# EAGLE board CT_Metering_Assignment-V_33_error checked for online (EAGLE 8.2.2)
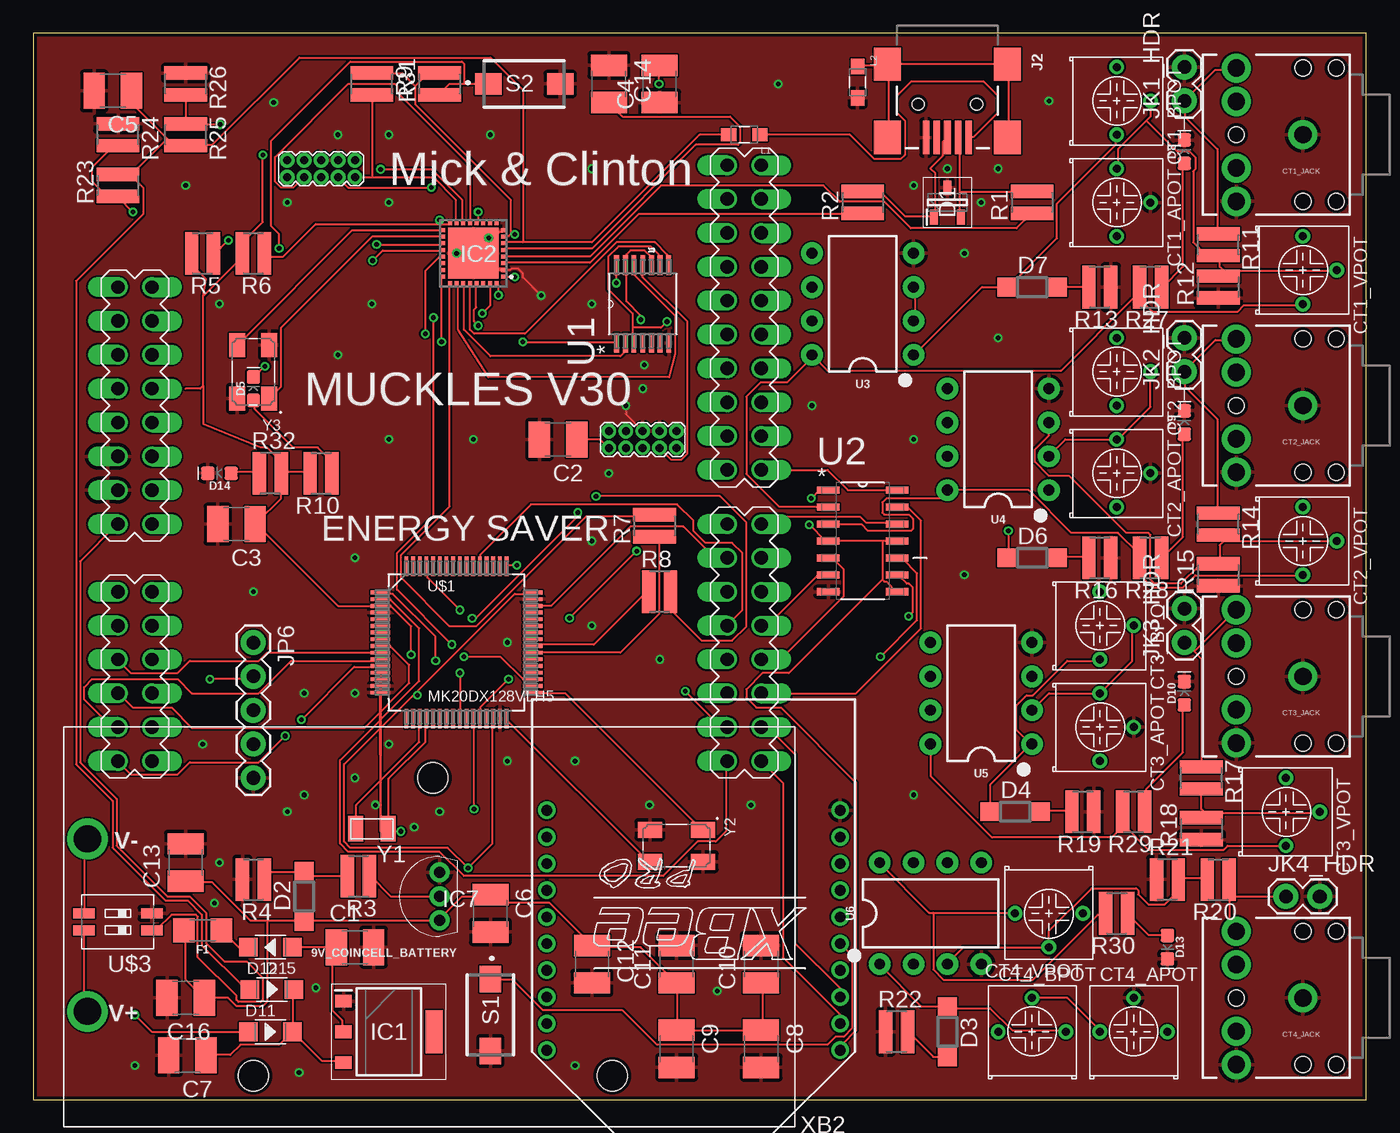
[diagram p0: board, top side]
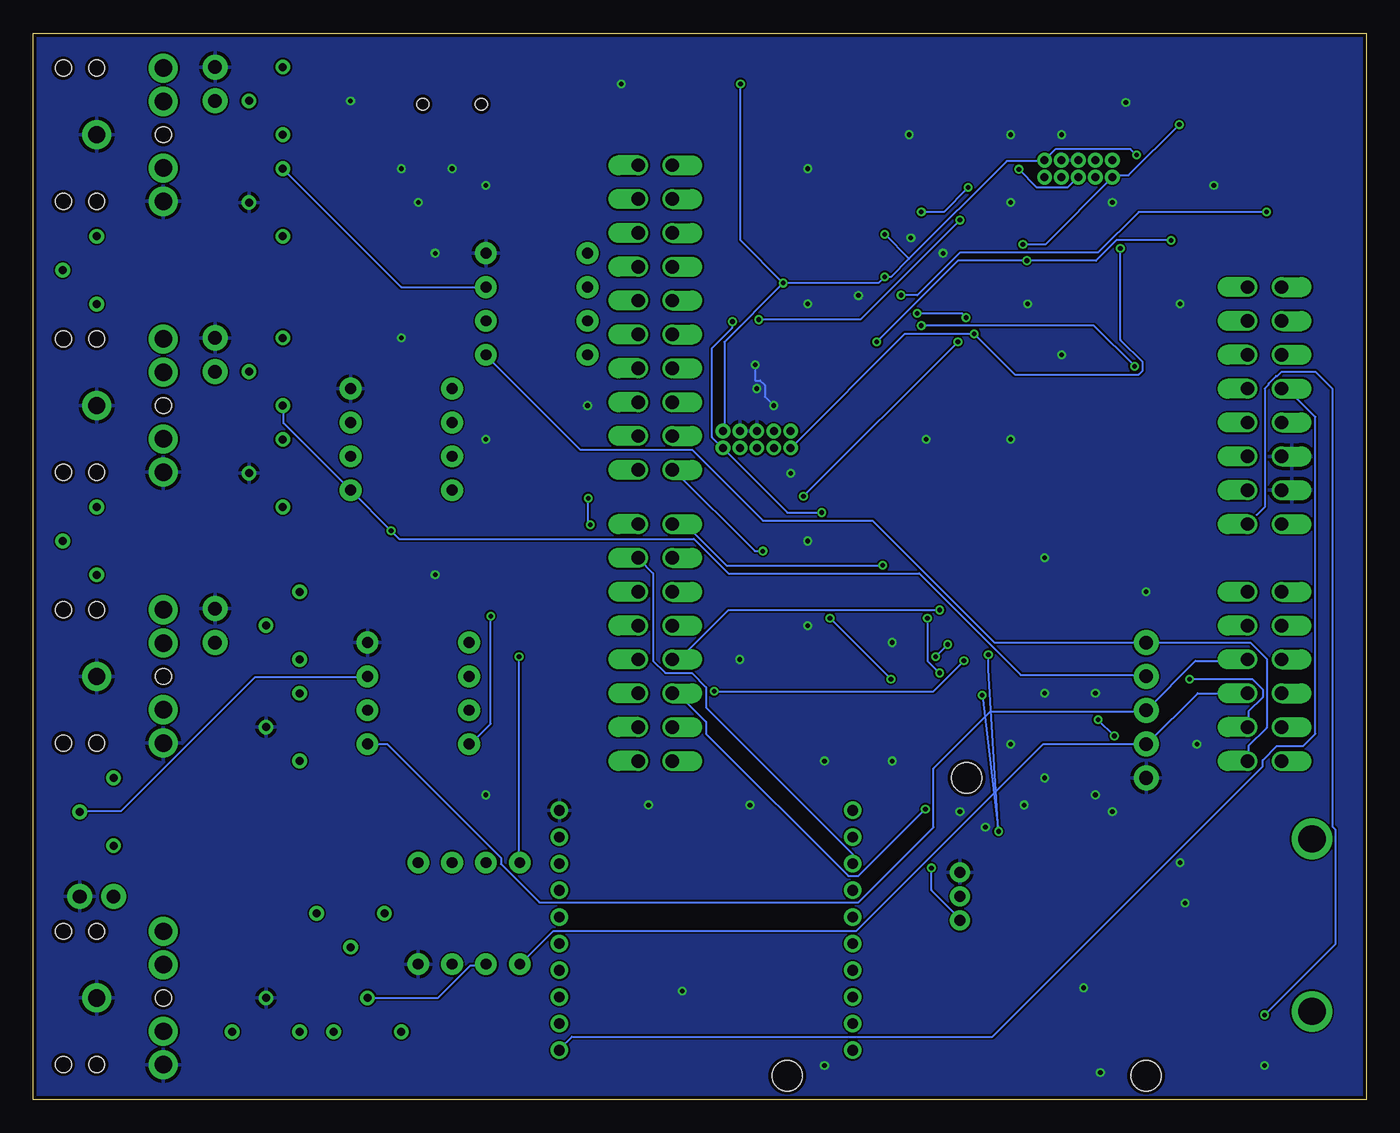
[diagram p1: board, bottom side, seen from below]

Size 100 x 80 mm. Coordinates in mm from the lower left corner, seen from the top.
Outline: 0,0 100,0 100,80 0,80 0,0
Copper layers (1*16): Top 0.035mm / dielectric 1.5mm / Bottom 0.035mm
Design rules "dirt_cheap_dirty_boards.v1": minimum track width 5mil, minimum drill 12mil, track to track 5mil, track to pad 5mil, pad to pad 5mil, via to via 5mil, smd to smd 0mil, copper to edge 10mil, drill to drill 10mil, minimum pad ring 10mil, minimum via ring 6mil, stop-mask expansion 2mil, vias tented up to drill 25mil, thermal gap 10mil

## Footprints (pad centres in the part's own frame; a part is rotated, then mirrored left to right if it is on the bottom)
BC9VPC = drill 2.032: V+ 53.086,21.336; V- 53.086,8.382 | hole 2.286: 27.178,3.81; 13.716,26.162; 40.64,26.162
C1210 = smd 1.6 x 2.7: 1 -1.4,0; 2 1.4,0
RTRIM3362P = drill 0.6: 1 -2.54,-2.54; 2 0,0; 3 2.54,-2.54
AUDIO-JACK = drill 1.3 pad 2.184: RING 5,5; RSH 5,2.5; SLEEVE 0,0; TIP 5,-5; TSH 5,-2.5 | hole 1.2: 0,5; -2.5,5; -2.5,-5; 0,-5; 5,0
SOT100P248X115-3N = smd 1.1 x 0.6: 1 -1.1,1; 2 -1.1,-1; 3 1.1,0
SOD123 = smd 1.4 x 1.4: A 1.9,0; C -1.9,0
LED-0603 = smd 1 x 1: A -0.877,0; C 0.877,0
SOD-123 = smd 1.397 x 1.397: + -1.651,0; - 1.651,0
1206 = smd 1.6 x 1.8: 1 -1.4,0; 2 1.4,0
FRDM-K20D50M = drill 1 offset: J2_1 -22.86,-1.524; J2_2 -25.4,-1.524; J2_3 -22.86,-4.064; J2_4 -25.4,-4.064; J2_5 -22.86,-6.604; J2_6 -25.4,-6.604; J2_7 -22.86,-9.144; J2_8 -25.4,-9.144; J2_9 -22.86,-11.684; J2_10 -25.4,-11.684; J2_11 -22.86,-14.224; J2_12 -25.4,-14.224; J2_13 -22.86,-16.764; J2_14 -25.4,-16.764; J2_15 -22.86,-19.304; J2_16 -25.4,-19.304; J2_17 -22.86,-21.844; J2_18 -25.4,-21.844; J2_19 -22.86,-24.384; J2_20 -25.4,-24.384; J9_1 20.32,-15.24; J9_2 22.86,-15.24; J9_3 20.32,-12.7; J9_4 22.86,-12.7; J9_5 20.32,-10.16; J9_6 22.86,-10.16; J9_7 20.32,-7.62; J9_8 22.86,-7.62; J9_9 20.32,-5.08; J9_10 22.86,-5.08; J9_11 20.32,-2.54; J9_12 22.86,-2.54; J9_13 20.32,0; J9_14 22.86,0; J9_15 20.32,2.54; J9_16 22.86,2.54; J10_1 20.32,7.62; J10_2 22.86,7.62; J10_3 20.32,10.16; J10_4 22.86,10.16; J10_5 20.32,12.7; J10_6 22.86,12.7; J10_7 20.32,15.24; J10_8 22.86,15.24; J10_9 20.32,17.78; J10_10 22.86,17.78; J10_11 20.32,20.32; J10_12 22.86,20.32; J19_1 -22.86,20.32; J19_2 -25.4,20.32; J19_3 -22.86,17.78; J19_4 -25.4,17.78; J19_5 -22.86,15.24; J19_6 -25.4,15.24; J19_7 -22.86,12.7; J19_8 -25.4,12.7; J19_9 -22.86,10.16; J19_10 -25.4,10.16; J19_11 -22.86,7.62; J19_12 -25.4,7.62; J19_13 -22.86,5.08; J19_14 -25.4,5.08; J19_15 -22.86,2.54; J19_16 -25.4,2.54
SOT230P700X180-4N = smd 1.25 x 0.95: 1 -3.4,2.3; 2 -3.4,0; 3 -3.4,-2.3 | smd 1.25 x 3.2: 4 3.4,0
SOT617-14 = smd 0.4 x 0.3: 1 -2.29,1.758; 2 -2.29,1.258; 3 -2.29,0.758; 4 -2.29,0.258; 5 -2.29,-0.242; 6 -2.29,-0.742; 7 -2.29,-1.242; 8 -2.29,-1.742; 17 2.31,-1.742; 18 2.31,-1.242; 19 2.31,-0.742; 20 2.31,-0.242; 21 2.31,0.258; 22 2.31,0.758; 23 2.31,1.258; 24 2.31,1.758 | smd 0.3 x 0.4: 9 -1.74,-2.292; 10 -1.24,-2.292; 11 -0.74,-2.292; 12 -0.24,-2.292; 13 0.26,-2.292; 14 0.76,-2.292; 15 1.26,-2.292; 16 1.76,-2.292; 25 1.76,2.308; 26 1.26,2.308; 27 0.76,2.308; 28 0.26,2.308; 29 -0.24,2.308; 30 -0.74,2.308; 31 -1.24,2.308; 32 -1.74,2.308 | smd 3.8 x 3.8: 33 0,0
TO-92 = drill 0.81 pad 1.51: 1 0,-1.8; 2 0,0; 3 0,1.8
USB-MINIB = smd 2.5 x 0.5: D+ 2.5,0; D- 2.5,0.8; GND 2.5,-1.6; ID 2.5,-0.8; VBUS 2.5,1.6 | smd 2.5 x 2: S1 -3,4.5; S2 2.5,4.5; S3 -3,-4.5; S4 2.5,-4.5 | hole 0.9: 0,2.2; 0,-2.2
1X02 = drill 1.016 pad 1.88: 1 0,0; 2 2.54,0
1X05 = drill 1.016 pad 1.88: 1 0,0; 2 2.54,0; 3 5.08,0; 4 7.62,0; 5 10.16,0
INDC2012X87 = smd 1.15 x 1: 1 -1.175,0; 2 1.175,0
PRL1632 = smd 1 x 3.2: 1 -0.822,0; 2 0.822,0
EVQPE1 = smd 2 x 1.6: 1 -2.7,0; 2 2.7,0
SOP65P640X120-14N = smd 1.473 x 0.356: 1 -2.921,1.956; 2 -2.921,1.295; 3 -2.921,0.66; 4 -2.921,0; 5 -2.921,-0.66; 6 -2.921,-1.295; 7 -2.921,-1.956; 8 2.921,-1.956; 9 2.921,-1.295; 10 2.921,-0.66; 11 2.921,0; 12 2.921,0.66; 13 2.921,1.295; 14 2.921,1.956
SOIC127P600X175-14N = smd 1.702 x 0.533: 1 -2.591,3.81; 2 -2.591,2.54; 3 -2.591,1.27; 4 -2.591,0; 5 -2.591,-1.27; 6 -2.591,-2.54; 7 -2.591,-3.81; 8 2.591,-3.81; 9 2.591,-2.54; 10 2.591,-1.27; 11 2.591,0; 12 2.591,1.27; 13 2.591,2.54; 14 2.591,3.81
DIP08 = drill 0.813 pad 1.626: 1 -3.81,-3.81; 2 -1.27,-3.81; 3 1.27,-3.81; 4 3.81,-3.81; 5 3.81,3.81; 6 1.27,3.81; 7 -1.27,3.81; 8 -3.81,3.81
QFP50P1200X1200X160-64N = smd 1.473 x 0.279: 1 -5.715,3.759; 2 -5.715,3.251; 3 -5.715,2.743; 4 -5.715,2.261; 5 -5.715,1.753; 6 -5.715,1.245; 7 -5.715,0.762; 8 -5.715,0.254; 9 -5.715,-0.254; 10 -5.715,-0.762; 11 -5.715,-1.245; 12 -5.715,-1.753; 13 -5.715,-2.261; 14 -5.715,-2.743; 15 -5.715,-3.251; 16 -5.715,-3.759; 33 5.715,-3.759; 34 5.715,-3.251; 35 5.715,-2.743; 36 5.715,-2.261; 37 5.715,-1.753; 38 5.715,-1.245; 39 5.715,-0.762; 40 5.715,-0.254; 41 5.715,0.254; 42 5.715,0.762; 43 5.715,1.245; 44 5.715,1.753; 45 5.715,2.261; 46 5.715,2.743; 47 5.715,3.251; 48 5.715,3.759 | smd 0.279 x 1.473: 17 -3.759,-5.715; 18 -3.251,-5.715; 19 -2.743,-5.715; 20 -2.261,-5.715; 21 -1.753,-5.715; 22 -1.245,-5.715; 23 -0.762,-5.715; 24 -0.254,-5.715; 25 0.254,-5.715; 26 0.762,-5.715; 27 1.245,-5.715; 28 1.753,-5.715; 29 2.261,-5.715; 30 2.743,-5.715; 31 3.251,-5.715; 32 3.759,-5.715; 49 3.759,5.715; 50 3.251,5.715; 51 2.743,5.715; 52 2.261,5.715; 53 1.753,5.715; 54 1.245,5.715; 55 0.762,5.715; 56 0.254,5.715; 57 -0.254,5.715; 58 -0.762,5.715; 59 -1.245,5.715; 60 -1.753,5.715; 61 -2.261,5.715; 62 -2.743,5.715; 63 -3.251,5.715; 64 -3.759,5.715
2X5_0.05"_TH_NS = drill 0.6 pad 0.95: 1 -2.54,-0.635; 2 -2.54,0.635; 3 -1.27,-0.635; 4 -1.27,0.635; 5 0,-0.635; 6 0,0.635; 7 1.27,-0.635; 8 1.27,0.635; 9 2.54,-0.635; 10 2.54,0.635
CHS-02A = smd 0.76 x 1.6: 1 0,-2.54; 2 1.27,-2.54; 3 1.27,2.54; 4 0,2.54
XBEE-PRO = drill 0.8 pad 1.27: 1 -11,9; 2 -11,7; 3 -11,5; 4 -11,3; 5 -11,1; 6 -11,-1; 7 -11,-3; 8 -11,-5; 9 -11,-7; 10 -11,-9; 11 11,-9; 12 11,-7; 13 11,-5; 14 11,-3; 15 11,-1; 16 11,1; 17 11,3; 18 11,5; 19 11,7; 20 11,9
XTAL320X150X90 = smd 1.092 x 1.905: 1 -1.219,0; 2 1.219,0
OSCSC500X320X110-4N = smd 1.2 x 1.8: 1 -1.2,2; 2 -1.2,-2; 3 1.2,-2; 4 1.2,2

## Placement (x,y rotation side)
9V_COINCELL_BATTERY  [BC9VPC]  57.15,27.94 180 top
C1  10UF  [C1210]  24.13,11.43 0 top
C2  1.0UF  [C1210]  39.37,49.53 180 top
C3  0.1UF  [C1210]  15.24,43.18 180 top
C4  1.0UF  [C1210]  46.99,76.2 90 top
C5  1.0UF  [C1210]  5.97,75.69 180 top
C6  0.1UF  [C1210]  34.29,13.97 270 top
C7  10UF  [C1210]  11.56,3.3 180 top
C8  1.0UF  [C1210]  54.61,3.81 270 top
C9  1.0UF  [C1210]  48.26,3.81 270 top
C10  1.0UF  [C1210]  54.61,10.16 90 top
C11  1.0UF  [C1210]  48.26,10.16 90 top
C12  1.0UF  [C1210]  41.91,10.16 270 top
C13  1.0UF  [C1210]  11.43,17.78 90 top
C14  2.2UF  [C1210]  43.18,76.2 270 top
C16  2.2UF  [C1210]  11.43,7.62 180 top
CT1_APOT  RTRIM-3362P  [RTRIM3362P]  83.82,67.31 270 top
CT1_BPOT  RTRIM-3362P  [RTRIM3362P]  83.82,74.93 270 top
CT1_JACK  [AUDIO-JACK]  95.25,72.39 180 top
CT1_VPOT  RTRIM-3362P  [RTRIM3362P]  97.79,62.23 270 top
CT2_APOT  RTRIM-3362P  [RTRIM3362P]  83.82,46.99 270 top
CT2_BPOT  RTRIM-3362P  [RTRIM3362P]  83.82,54.61 270 top
CT2_JACK  [AUDIO-JACK]  95.25,52.07 180 top
CT2_VPOT  RTRIM-3362P  [RTRIM3362P]  97.79,41.91 270 top
CT3_APOT  RTRIM-3362P  [RTRIM3362P]  82.55,27.94 270 top
CT3_BPOT  RTRIM-3362P  [RTRIM3362P]  82.55,35.56 270 top
CT3_JACK  [AUDIO-JACK]  95.25,31.75 180 top
CT3_VPOT  RTRIM-3362P  [RTRIM3362P]  96.52,21.59 270 top
CT4_APOT  RTRIM-3362P  [RTRIM3362P]  82.55,7.62 0 top
CT4_BPOT  RTRIM-3362P  [RTRIM3362P]  74.93,7.62 0 top
CT4_JACK  [AUDIO-JACK]  95.25,7.62 180 top
CT4_VPOT  RTRIM-3362P  [RTRIM3362P]  76.2,11.43 180 top
D1  GSOT03C-E3-08  [SOT100P248X115-3N]  68.58,67.31 90 top
D2  [SOD123]  20.32,15.24 90 top
D3  [SOD123]  68.58,5.08 270 top
D4  [SOD123]  73.66,21.59 0 top
D5  GREEN  [LED-0603]  16.51,53.34 90 top
D6  [SOD123]  74.93,40.64 0 top
D7  [SOD123]  74.93,60.96 0 top
D8  GREEN  [LED-0603]  86.36,71.12 90 top
D9  GREEN  [LED-0603]  86.36,50.8 90 top
D10  GREEN  [LED-0603]  86.36,30.48 90 top
D11  20V-1A  [SOD-123]  17.78,5.08 0 top
D12  20V-1A  [SOD-123]  17.91,8.26 0 top
D13  GREEN  [LED-0603]  85.09,11.43 270 top
D14  GREEN  [LED-0603]  13.97,46.99 180 top
D15  20V-1A  [SOD-123]  17.78,11.43 180 top
F1  6V/0.75A  [1206]  12.7,12.7 180 top
FRDM1  [FRDM-K20D50M]  29.21,45.72 180 top
IC1  NCP1117LPST33T3G  [SOT230P700X180-4N]  26.67,5.08 0 top
IC2  MK20DX128VFM5  [SOT617-14]  33.02,63.5 180 top
IC7  P0102DA_1AA3  [TO-92]  30.48,15.24 0 top
J2  USB_MINI-B_SMT  [USB-MINIB]  68.58,74.68 270 top
JK1_HDR  [1X02]  86.36,74.93 90 top
JK2_HDR  [1X02]  86.36,54.61 90 top
JK3_HDR  [1X02]  86.36,34.29 90 top
JK4_HDR  [1X02]  93.98,15.24 0 top
JP6  [1X05]  16.51,34.29 270 top
L1  BLM21PG331SN1D  [INDC2012X87]  53.34,72.39 180 top
L2  BLM21PG331SN1D  [INDC2012X87]  61.85,76.33 270 top
R1  33  [PRL1632]  74.93,67.31 90 top
R2  33  [PRL1632]  62.23,67.31 90 top
R3  1K  [PRL1632]  24.38,16.76 180 top
R4  1K  [PRL1632]  16.51,16.51 180 top
R5  10K  [PRL1632]  12.7,63.5 180 top
R6  10K  [PRL1632]  16.51,63.5 180 top
R7  1K  [PRL1632]  46.61,43.05 90 top
R8  1K  [PRL1632]  46.99,38.1 0 top
R9  10K  [PRL1632]  25.4,76.2 270 top
R10  220  [PRL1632]  21.59,46.99 180 top
R11  1K  [PRL1632]  88.9,64.14 270 top
R12  1K  [PRL1632]  88.9,60.96 90 top
R13  1K  [PRL1632]  80.01,60.96 180 top
R14  1K  [PRL1632]  88.9,43.18 270 top
R15  1K  [PRL1632]  88.9,39.37 90 top
R16  1K  [PRL1632]  80.01,40.64 180 top
R17  1K  [PRL1632]  87.63,24.13 270 top
R18  1K  [PRL1632]  87.63,20.32 90 top
R19  1K  [PRL1632]  78.74,21.59 180 top
R20  1K  [PRL1632]  88.9,16.51 180 top
R21  1K  [PRL1632]  85.09,16.51 0 top
R22  1K  [PRL1632]  64.77,5.08 0 top
R23  4.7K  [PRL1632]  6.35,68.58 90 top
R24  10K  [PRL1632]  6.35,72.39 270 top
R25  4.7K  [PRL1632]  11.43,72.39 270 top
R26  10K  [PRL1632]  11.43,76.2 270 top
R27  220  [PRL1632]  83.82,60.96 180 top
R28  220  [PRL1632]  83.82,40.64 180 top
R29  220  [PRL1632]  82.55,21.59 180 top
R30  220  [PRL1632]  81.28,13.97 180 top
R31  10K  [PRL1632]  30.48,76.2 90 top
R32  220  [PRL1632]  17.78,46.99 0 top
S1  EVQPE105K  [EVQPE1]  34.29,6.35 270 top
S2  EVQPE105K  [EVQPE1]  36.83,76.2 0 top
U1  SN74LVC125APW  [SOP65P640X120-14N]  45.72,59.69 90 top
U2  HEF4066BT  [SOIC127P600X175-14N]  62.23,41.91 0 top
U3  LM358  [DIP08]  62.23,59.69 90 top
U4  LM358  [DIP08]  72.39,49.53 90 top
U5  LM358  [DIP08]  71.12,30.48 90 top
U6  LM358  [DIP08]  67.31,13.97 0 top
U$1  MK20DX128VLH5  [QFP50P1200X1200X160-64N]  31.75,34.29 0 top
U$2  2X5_0.05"_CORTEX_DEBUGTH_NOKEY_UNSHROUDED  [2X5_0.05"_TH_NS]  21.59,69.85 180 top
U$3  2-POS-DIP  [CHS-02A]  6.35,12.7 90 top
U$6  SWD HHEADER  [2X5_0.05"_TH_NS]  45.72,49.53 180 top
XB2  XBEE-PRO  [XBEE-PRO]  49.53,12.7 180 top
Y1  ABS07AIG-32.768KHZ-9-1-T  [XTAL320X150X90]  25.4,20.32 180 top
Y2  ABM3B-8.000MHZ-B2-T  [OSCSC500X320X110-4N]  48.26,19.05 270 top
Y3  ABM3B-8.000MHZ-B2-T  [OSCSC500X320X110-4N]  16.51,54.61 180 top

## Library data of the parts
9V_COINCELL_BATTERY = SparkFun-Connectors; PROD_ID: BATT-10855
C1-C14 C16 = eagle-ltspice; SPICEMODEL: NONE; SPICEPREFIX: C
CT1_APOT CT1_BPOT CT1_VPOT CT2_APOT CT2_BPOT CT2_VPOT CT3_APOT CT3_BPOT CT3_VPOT CT4_APOT CT4_BPOT CT4_VPOT = GeekAmmo
CT1_JACK CT2_JACK CT3_JACK CT4_JACK JK1_HDR JK2_HDR JK3_HDR JK4_HDR JP6 = SparkFun-Connectors
D1 = GSOT03C-E3-08; ALLIED_NUMBER: 70061865; DESCRIPTION: Bidirectional TVS Single 504W 3.3V SOT23 Vishay GSOT03C-E3-08, Bi-Directional TVS Diode Common Anode, Dual, 12.3V, 504W, 3-Pin SOT-23; HEIGHT: 1.15mm; MANUFACTURER_NAME: Vishay; MANUFACTURER_PART_NUMBER: GSOT03C-E3-08; RS_PART_NUMBER: 6997957; SUPPLIER_NAME: RS
D2-D4 D6 D7 = sym
D5 D8-D10 D13 D14 = SparkFun-LED; PROD_ID: DIO-00821
D11 D12 D15 = Seeed-Diode; MPN: B5819W
F1 = SparkFun-Fuses; PROD_ID: RES-11150
FRDM1 = FRDM-K20D50M
IC1 = NCP1117LPST33T3G; ALLIED_NUMBER: 70466897; HEIGHT: 1.8mm; MANUFACTURER_NAME: ON Semiconductor; MANUFACTURER_PART_NUMBER: NCP1117LPST33T3G; RS_PART_NUMBER: 1245347; SUPPLIER_NAME: RS
IC2 = MK20DX128VFM5; DESCRIPTION: MCU, Kinetis, MK20DX128VFM5, QFN32 Freescale MK20DX128VFM5, 32bit ARM Cortex M4 MCU, 50MHz, 160 kB Flash, 32-Pin QFN; HEIGHT: mm; MANUFACTURER_NAME: NXP; MANUFACTURER_PART_NUMBER: MK20DX128VFM5; RS_PART_NUMBER: 8181223; SUPPLIER_NAME: RS
IC7 = P0102DA_1AA3; ALLIED_NUMBER: 70390354; HEIGHT: mm; MANUFACTURER_NAME: STMicroelectronics; MANUFACTURER_PART_NUMBER: P0102DA 1AA3; RS_PART_NUMBER: 7142647; SUPPLIER_NAME: RS
J2 = SparkFun-Connectors; PROD_ID: CONN-08193; SF_ID: PRT-00587
L1 L2 = BLM21PG331SN1D; AVAILABILITY: Good; DESCRIPTION: Ferrite Beads Multi-Layer 330Ohm 25%25 100MHz 1.5A 70mOhm DCR 0805 Paper T/R; MF: Murata; MP: BLM21PG331SN1D; PACKAGE: 0805 Murata; PRICE: 0.04 USD
R1-R32 = resistor
S1 S2 = EVQPE105K; DESCRIPTION: Tact switch,SMT,SPST,black,1.0N op force Black Push Plate Tactile Switch, SPST-NO 50 mA 5mm; HEIGHT: mm; MANUFACTURER_NAME: Panasonic; MANUFACTURER_PART_NUMBER: EVQPE105K; RS_PART_NUMBER: 7561669; SUPPLIER_NAME: RS
U1 = SN74LVC125APW; AVAILABILITY: Good; DESCRIPTION: Buffer-line Driver 4 Channel Non-Inverting 3 State CMOS 14-Pin TSSOP Tube; MF: Texas Instruments; MP: SN74LVC125APW; PACKAGE: TSSOP-14 Texas Instruments; PRICE: 0.22 USD
U2 = HEF4066BT; AVAILABILITY: Good; DESCRIPTION: Analog Switch Quad SPST Automotive 14-Pin SO; MF: NXP Semiconductors; MP: HEF4066BT; PACKAGE: SO-14 NXP Semiconductors; PRICE: 0.21 USD
U3-U6 = SparkFun-IC-Amplifiers; PROD_ID: IC-09172
U$1 = MK20DX128VLH5; AVAILABILITY: Good; DESCRIPTION: MCU 32-bit Kinetis K20 ARM Cortex M4 RISC 128KB Flash 1.8V/2.5V/3.3V 64-Pin LQFP Tray; MF: NXP Semiconductors; MP: MK20DX128VLH5; PACKAGE: LQFP-64 NXP Semiconductors; PRICE: 4.22 USD
U$2 U$6 = con-cortex
U$3 = SparkFun-Electromechanical; PROD_ID: SWCH-12372
XB2 = maxstream; MPN: XBP24-AWI-001; OC_FARNELL: 1337916; OC_NEWARK: 42M2667
Y1 = ABS07AIG-32.768KHZ-9-1-T; AVAILABILITY: Good; DESCRIPTION: Crystal 32.768khz 9pf Smd; MF: Abracon; MP: ABS07AIG-32.768KHZ-9-1-T; PACKAGE: SMD-2 Abracon; PRICE: 0.53 USD
Y2 Y3 = ABM3B-8.000MHZ-B2-T; AVAILABILITY: Good; DESCRIPTION: Crystal 8MHz %C2%B120ppm %28Tol%29 %C2%B150ppm %28Stability%29 18pF FUND 200Ohm 4-Pin CSMD T/R; MF: Abracon; MP: ABM3B-8.000MHZ-B2-T; PACKAGE: SMD-4 Abracon; PRICE: 0.44 USD

## Nets
ADC0_DM0_K20B: FRDM1.J10_6 U$1.10
ADC0_DM0_K20M: CT1_BPOT.3 D7.C FRDM1.J10_11 JP6.1 U3.1
ADC0_DM3_K20B: FRDM1.J10_12 U$1.12
ADC0_DM3_K20M: CT4_BPOT.3 D3.C FRDM1.J10_7 JP6.4 U6.1
ADC0_DP0_K20B: FRDM1.J10_8 U$1.9
ADC0_DP0_K20M: CT2_BPOT.3 D6.C FRDM1.J10_9 JP6.2 U4.1
ADC0_DP3_K20B: FRDM1.J10_10 U$1.11
ADC0_DP3_K20M: CT3_BPOT.3 D4.C FRDM1.J10_5 JP6.3 U5.1
CT1_PWR: CT1_VPOT.3 R27.2 U2.2 U3.8
CT1B: FRDM1.J19_15 U$1.49
CT1M: FRDM1.J19_16 U2.12
CT2_PWR: CT2_VPOT.3 R28.2 U2.3 U4.8
CT2B: FRDM1.J19_9 U$1.53
CT2M: FRDM1.J19_10 U2.6
CT3_PWR: CT3_VPOT.3 R29.2 U2.9 U5.8
CT3B: FRDM1.J19_7 U$1.61
CT3M: FRDM1.J19_8 U2.5
CT4_PWR: CT4_VPOT.3 R30.2 U2.10 U6.8
CT4B: FRDM1.J19_5 U$1.27
CT4M: FRDM1.J19_6 U2.13
D+: IC2.3 R2.1
D-: IC2.4 R1.1
EXTAL32: U$1.20 Y1.1
GND: C1.2 C2.2 C3.2 C4.1 C5.2 C6.2 C7.2 C8.2 C9.2 C10.2 C11.2 C12.2 C13.2 C14.1 C16.2 CT1_APOT.2 CT1_JACK.RING CT1_JACK.SLEEVE CT2_APOT.2 CT2_JACK.RING CT2_JACK.SLEEVE CT3_APOT.2 CT3_JACK.RING CT3_JACK.SLEEVE CT4_APOT.2 CT4_JACK.RING CT4_JACK.SLEEVE D1.3 D8.C D9.C D10.C D13.C D14.C FRDM1.J9_12 FRDM1.J9_14 IC1.1 IC2.2 IC2.8 IC2.33 IC7.3 J2.GND JK1_HDR.2 JK2_HDR.2 JK3_HDR.2 JK4_HDR.2 JP6.5 L2.2 R4.2 R12.1 R13.1 R15.1 R16.1 R18.1 R19.1 R21.1 R22.1 R24.1 R26.1 S1.2 S2.2 U1.7 U2.7 U3.4 U4.4 U5.4 U6.4 U$1.4 U$1.15 U$1.16 U$1.31 U$1.47 U$2.3 U$2.5 U$3.2 U$6.3 U$6.5 XB2.10 Y2.2 Y2.4 Y3.2 Y3.4
MUXB: FRDM1.J2_1 U$1.28
MUXM: FRDM1.J2_2 U2.14
N$1: 9V_COINCELL_BATTERY.V- U$3.3
N$2: C1.1 D15.+ IC1.2
N$3: D6.A R16.2
N$4: D15.- F1.1
N$5: D2.A R3.2 R4.1
N$6: D7.A R13.2
N$7: U$1.32 Y2.3
N$8: U$1.33 Y2.1
N$9: J2.S1 J2.S2 J2.S3 J2.S4 L2.1
N$10: D4.A R19.2
N$11: CT2_VPOT.2 R14.2 R15.2 U4.3
N$12: 9V_COINCELL_BATTERY.V+ U$3.4
N$13: C7.1 D11.- D12.- IC1.3
N$14: D8.A R27.1
N$15: D1.2 J2.D- R1.2
N$16: IC7.2 R3.1
N$17: CT4_APOT.1 CT4_BPOT.2 U6.2
N$18: D9.A R28.1
N$19: D3.A R22.2
N$20: D1.1 J2.D+ R2.2
N$21: D5.C IC2.29
N$22: D5.A R10.1
N$23: D10.A R29.1
N$24: S1.1 XB2.5
N$25: D13.A R30.1
N$26: CT1_APOT.1 CT1_BPOT.2 CT1_VPOT.2 R11.2 R12.2 U3.2 U3.3
N$27: D14.A R32.1
N$36: CT2_JACK.TIP JK2_HDR.1 R14.1
N$42: CT2_APOT.1 CT2_BPOT.2 U4.2
N$58: CT1_JACK.TIP JK1_HDR.1 R11.1
N$59: IC2.32 R23.1 R24.2
N$66: CT3_JACK.TIP JK3_HDR.1 R17.1
N$67: CT3_VPOT.2 R17.2 R18.2 U5.3
N$70: CT3_APOT.1 CT3_BPOT.2 U5.2
N$76: CT4_JACK.TIP JK4_HDR.1 R20.1
N$77: CT4_VPOT.2 R20.2 R21.2 U6.3
P5-9V_VINB: D11.+
P5-9V_VINM: FRDM1.J9_16 U$3.1
P5V0_SDA_USB: J2.VBUS L1.1
P5V_SDA: C5.1 D12.+ IC2.6 L1.2 R23.2 R25.2
RST_TGTMCU: C2.1 IC2.21 R31.1 S2.1 U$6.10
SDA_EXTAL: IC2.17 Y3.3
SDA_JTAG_TCLK: IC2.12 U$2.4
SDA_JTAG_TDI: IC2.13 U$2.8
SDA_JTAG_TDO: IC2.14 U$2.6
SDA_JTAG_TMS: IC2.15 R9.2 U$2.2
SDA_PTD6: IC2.31 U$1.35
SDA_RST: IC2.19 R25.1 R26.2 U$2.10
SDA_SPIO_SCK: IC2.26 U1.12
SDA_SPIO_SIN: IC2.28 U1.8
SDA_SWD_EN: IC2.16 R6.1 U1.10 U1.13
SDA_SWD_OE_B: IC2.20 R5.1 U1.1
SDA_USB_VOUT33: C14.2 IC2.5
SDA_XTAL: IC2.18 Y3.1
SLPB: FRDM1.J19_13 U$1.46
SLPM: FRDM1.J19_14 XB2.13
SPI0_SOUT: IC2.27 U1.2
SWD_CLK_TGTMCU: U1.11 U$6.4
SWD_DIO_TGTMCU: U1.3 U1.9 U$1.25 U$6.2
UART1_RXB: FRDM1.J19_1 U$1.2
UART1_RXM: FRDM1.J19_2 XB2.2
UART1_TXB: FRDM1.J19_3 U$1.1
UART1_TXM: FRDM1.J19_4 XB2.3
UART1RX_TGTMCU: IC2.25 R7.2
UART1TX_TGTMCU: IC2.24 R8.2
UARTRX: R7.1 U$1.39
UARTTX: R8.1 U$1.40
VCCB: C3.1 C4.2 C6.1 C8.1 C9.1 C10.1 C11.1 C12.1 C13.1 C16.1 D2.C F1.2 IC2.1 IC2.7 IC7.1 R5.2 R6.2 R9.1 R10.2 R31.2 R32.2 U1.14 U$1.3 U$1.13 U$1.14 U$1.30 U$1.48 U$2.1 U$6.1
VCCM: FRDM1.J9_8 U2.1 U2.4 U2.8 U2.11 XB2.1
XTAL32: U$1.19 Y1.2

## Tracks (layer width: path | path; a pad name or v marks a point on that pad's centre or on a via)
ADC0_DM0_K20B
  Top 0.152: U$1.10 17.53,33.53 16.92,32.92 11.73,32.92 10.82,32 7.32,32 6.4,32.92 FRDM1.J10_6
ADC0_DM0_K20M
  Top 0.152: U3.1 66.14,55.93 71.17,60.96 D7.C 73.15,60.96 76.81,64.62 76.81,67.21 81.23,71.63 81.23,72.39 CT1_BPOT.3
  Bottom 0.152: FRDM1.J10_11 8.84,25.45 8.84,26.52 7.47,27.89 7.47,33.07 8.69,34.29 JP6.1 27.89,34.29 37.03,43.43 45.26,43.43 50.6,48.77 58.98,48.77 65.99,55.78 U3.1
ADC0_DM3_K20B  (via drill 0.35)
  Top 0.152: v20.12,28.5 24.08,32.46 25.91,32.46 U$1.12 | v18.9,27.28 16.92,25.3 11.73,25.3 10.82,24.38 7.32,24.38 6.4,25.3 FRDM1.J10_12
  Bottom 0.152: v18.9,27.28 v20.12,28.5
ADC0_DM3_K20M
  Top 0.152: U6.1 63.55,10.06 66.6,7.01 68.58,7.01 D3.C 68.58,6.86 71.78,6.86 73.46,5.18 77.42,5.18 CT4_BPOT.3
  Bottom 0.152: FRDM1.J10_7 12.65,30.48 16.46,26.67 JP6.4 24.23,26.67 38.25,12.65 60.96,12.65 63.4,10.21 U6.1
ADC0_DP0_K20B
  Top 0.152: U$1.9 26.06,33.98 26.82,33.98 28.19,32.61 28.19,31.24 24.84,27.89 11.89,27.89 10.36,29.41 7.47,29.41 6.4,30.48 FRDM1.J10_8
ADC0_DP0_K20M  (via drill 0.35)
  Top 0.152: v13.26,31.55 16.31,31.55 JP6.2 | v73.15,42.67 73.15,40.69 D6.C
  Bottom 0.152: v13.26,31.55 8.53,31.55 7.77,30.79 7.77,30.18 8.84,29.11 8.84,28.04 FRDM1.J10_9 | CT2_BPOT.3 81.23,51.97 81.23,50.75 U4.1 v73.15,42.67 72.54,42.06 50.44,42.06 47.85,39.47 33.53,39.47 25.91,31.85 16.61,31.85 JP6.2
ADC0_DP3_K20B
  Top 0.152: U$1.11 25.91,32.92 19.36,32.92 16.92,30.48 11.89,30.48 10.82,31.55 4.42,31.55 3.81,30.94 3.81,30.02 5.79,28.04 6.25,28.04 FRDM1.J10_10
ADC0_DP3_K20M
  Top 0.152: 74.83,26.67 71.78,23.62 71.78,21.64 D4.C | 74.83,26.67 73.76,27.74 73.76,29.57 74.52,30.33 74.98,30.33 77.57,32.92 80.01,32.92 CT3_BPOT.3 | 74.83,26.67 U5.1
  Bottom 0.152: FRDM1.J10_5 8.99,32.92 12.8,32.92 JP6.3 16.61,29.11 28.19,29.11 32.46,24.84 32.46,20.42 38.1,14.78 62.03,14.78 64.92,17.68 64.92,18.14 73.46,26.67 U5.1
CT1_PWR
  Top 0.152: 83.06,60.05 83.97,59.13 90.37,59.13 90.83,59.59 95.25,59.59 CT1_VPOT.3 | 83.06,60.05 83.06,60.96 R27.2 83.06,60.05 | 58.52,55.78 56.54,53.8 54.56,53.8 53.49,52.73 53.49,46.94 55.93,44.5 59.59,44.5 U2.2 | 83.06,60.05 82.45,60.05 77.11,54.71 59.59,54.71 58.52,55.78 | 58.52,55.78 U3.8
CT1B  (via drill 0.35)
  Top 0.152: v36.27,40.08 35.51,40.08 U$1.49
  Bottom 0.152: v36.27,40.08 48.01,40.08 51.05,43.13 51.97,43.13 FRDM1.J19_15
CT1M
  Top 0.152: FRDM1.J19_16 55.17,43.74 62.03,43.74 62.48,43.28 64.77,43.28 U2.12
CT2_PWR
  Top 0.152: U2.3 59.74,43.13 62.18,43.13 62.64,42.67 65.84,42.67 65.99,42.82 65.99,43.59 65.68,43.89 63.86,43.89 63.7,44.04 63.7,44.81 64.01,45.11 67.97,45.11 U4.8 74.68,45.72 77.88,42.52 81.38,42.52 82.91,41 82.91,40.69 R28.2 83.06,40.54 83.06,39.32 83.97,38.41 86.26,38.41 87.17,39.32 95.25,39.32 CT2_VPOT.3
CT2B
  Top 0.152: U$1.53 33.53,40.08 33.53,40.84 37.34,44.65 48.31,44.65 49.53,43.43 49.53,42.67 50.44,41.76 52.43,41.76 53.19,41 53.19,36.73 52.12,35.66 FRDM1.J19_9
CT2M
  Top 0.152: U2.6 59.59,39.32 58.83,39.32 55.17,35.66 54.71,35.66 FRDM1.J19_10
CT3_PWR  (via drill 0.35)
  Top 0.152: v65.68,36.27 65.99,36.58 65.99,38.41 65.68,38.71 65.53,38.71 64.92,39.32 U2.9 | CT3_VPOT.3 89.61,19.05 89.31,18.75 83.67,18.75 81.84,20.57 | 81.84,20.57 81.84,21.49 R29.2 81.84,20.57 | 81.84,20.57 80.92,19.66 71.93,19.66 67.36,24.23 67.36,26.67 U5.8
  Bottom 0.152: v65.68,36.27 65.68,28.19 67.21,26.67 U5.8
CT3B  (via drill 0.35)
  Top 0.152: v32,36.73 29.57,39.17 29.57,39.93 U$1.61
  Bottom 0.152: v32,36.73 47.85,36.73 51.51,33.07 51.97,33.07 FRDM1.J19_7
CT3M
  Top 0.152: U2.5 59.74,40.54 60.05,40.54 60.81,39.78 60.81,37.8 56.08,33.07 54.71,33.07 FRDM1.J19_8
CT4_PWR  (via drill 0.35)
  Top 0.152: v63.55,33.22 66.29,35.97 66.29,39.47 65.23,40.54 64.92,40.54 U2.10 | 67.51,14.02 67.21,14.02 63.55,17.68 U6.8 | 67.51,14.02 73.61,14.02 CT4_VPOT.3 | 67.51,14.02 67.51,9.75 68.28,8.99 74.98,8.99 79.86,13.87 80.31,13.87 R30.2
  Bottom 0.152: v63.55,33.22 63.55,17.83 U6.8
CT4B  (via drill 0.35)
  Top 0.152: v33.07,21.79 33.07,28.5 U$1.27
  Bottom 0.152: v33.07,21.79 38.1,16.76 38.86,16.76 49.53,27.43 49.53,28.35 51.66,30.48 FRDM1.J19_5
CT4M
  Top 0.152: FRDM1.J19_6 61.72,30.48 66.6,35.36 66.6,43.43 65.68,44.35 64.92,44.35 U2.13
D+
  Top 0.152: IC2.3 35.36,62.79 41.76,62.79 45.41,66.45 62.18,66.45 R2.1
D-
  Top 0.152: IC2.4 35.36,63.25 41.76,63.25 47.09,68.58 59.28,68.58 60.5,67.36 63.86,67.36 65.84,65.38 73.76,65.38 74.83,66.45 R1.1
EXTAL32
  Top 0.152: U$1.20 29.41,28.5 29.41,26.82 26.67,24.08 26.67,20.42 Y1.1
GND  (via drill 0.35)
  Top 0.152: IC2.2 35.2,62.33 34.9,62.33 33.83,63.4 33.07,63.4 IC2.33 33.4,63.5 35.02,65.12 35.19,65.12 IC2.8 | IC2.2 33.01,62.24 v31.75,63.5 | v38.1,60.33 36.73,61.7 36.73,61.97 36.37,62.33 35.87,62.33 35.78,62.24 IC2.2 | v44.45,52.07 44.45,51.44 U$6.5
  Bottom 0.152: v45.85,55.12 45.85,53.95 45.47,53.95 45.11,53.59 45.11,52.73 v44.45,52.07
  other vias: 13.97,59.69 22.86,55.88 25.4,59.69 40.64,25.4 19.05,21.59 20.32,22.86 66.04,22.86 69.85,39.37 66.04,49.53 58.42,52.07 72.39,57.15 69.85,63.5 55.88,76.2 41.91,69.85 34.29,72.39 76.2,74.93 26.67,72.39 11.43,68.58 41.91,59.69 26.67,49.53 33.02,49.53 41.91,41.91 24.13,40.64 35.56,34.29 41.91,35.56 16.51,38.1 30.48,21.59 12.7,26.67 7.62,2.54 40.64,2.54 24.13,24.13 26.67,26.67 24.13,30.48 13.97,17.78 13.59,14.73 21.21,8.38 19.94,2.03 25.65,22.1 28.57,20.45 26.67,67.31 19.05,67.31 22.86,72.39 18.03,74.8 34.16,64.64 66.04,68.58 68.58,69.85 72.39,69.85 71.12,67.31 45.72,53.34 43.18,46.99 35.56,25.4 20.32,30.48 46.23,22.1 53.85,22.1 51.31,8.13 46.99,33.02
  pour Bottom: -3.81,90.17 105.41,88.9 120.65,73.66 120.65,1.27 106.68,-12.7 0,-12.7 -10.16,-2.54 -8.89,85.09
  pour Top: -5.08,86.36 104.14,86.36 118.11,72.39 118.11,2.54 106.68,-8.89 1.27,-8.89 -8.89,1.27 -8.89,82.55
MUXB  (via drill 0.35)
  Top 0.152: v35.66,31.55 33.53,29.41 33.53,28.65 U$1.28 | v45.26,41.15 v40.23,36.12
  Bottom 0.152: v40.23,36.12 v35.66,31.55 | v45.26,41.15 45.87,41.15 51.97,47.24 FRDM1.J2_1
MUXM
  Top 0.152: U2.14 61.11,45.72 59.59,47.24 FRDM1.J2_2
N$1
  Top 0.152: U$3.3 3.81,19.36 3.96,19.51 9V_COINCELL_BATTERY.V-
N$2
  Top 0.152: 22.4,11.12 22.4,6.71 23.16,5.94 23.16,5.18 IC1.2 | 22.4,11.12 22.71,11.43 C1.1 22.4,11.12 | D15.+ 22.1,11.43 22.4,11.12
N$3
  Top 0.152: D6.A 76.96,40.69 79.1,40.69 R16.2
N$4
  Top 0.152: D15.- 15.39,11.43 14.17,12.65 F1.1
N$5
  Top 0.152: R4.1 17.37,16.61 17.83,17.07 20.27,17.07 D2.A 20.42,17.07 20.73,16.76 R3.2
N$6
  Top 0.152: R13.2 D7.A
N$7
  Top 0.152: U$1.32 35.51,28.5 46.18,17.83 Y2.3
N$8
  Top 0.152: U$1.33 37.49,30.48 39.93,30.48 50.14,20.27 Y2.1
N$9
  Top 0.152: J2.S2 73.15,72.24 73.15,77.57 J2.S1 73,77.72 64.16,77.72 J2.S3 | L2.1 61.87,77.57 64.01,77.57 J2.S3 | J2.S4 64.16,72.24 64.16,77.57 J2.S3
N$10
  Top 0.152: D4.A 75.59,21.64 77.88,21.64 R19.2
N$11
  Top 0.152: 89.31,41.91 CT2_VPOT.2 | 89.31,41.91 89,42.22 R14.2 89.31,41.91 | 89.31,41.91 89,41.6 89,40.23 R15.2 88.85,40.08 87.48,40.08 86.11,38.71 84.12,38.71 83.82,39.01 83.82,42.37 83.67,42.52 81.99,42.52 77.72,46.79 76.2,46.79 75.13,47.85 75.13,48.77 76.2,49.84 U4.3
N$12
  Top 0.152: U$3.4 3.81,6.86 9V_COINCELL_BATTERY.V+
N$13
  Top 0.152: IC1.3 23.16,2.9 21.64,2.9 19.51,5.03 D11.- | D12.- 19.51,8.23 19.51,5.18 D11.- | C7.1 13.11,3.35 14.78,3.35 15.54,4.12 18.44,4.12 19.36,5.03 D11.-
N$14
  Top 0.152: D8.A 86.26,70.1 86.26,62.48 84.73,60.96 R27.1
N$15
  Top 0.152: 69.49,68.12 69.49,72.08 J2.D- | 69.49,68.12 69.49,66.29 D1.2 | 69.49,68.12 74.83,68.12 R1.2
N$16
  Top 0.152: IC7.2 26.82,15.24 25.3,16.76 R3.1
N$17
  Top 0.152: CT4_BPOT.2 77.57,7.62 80.01,5.18 CT4_APOT.1
  Bottom 0.152: CT4_BPOT.2 69.65,7.62 67.21,10.06 66.14,10.06 U6.2
N$18
  Top 0.152: D9.A 86.26,49.84 86.26,42.22 84.73,40.69 R28.1
N$19
  Top 0.152: D3.A 68.58,3.2 67.51,3.2 65.68,5.03 R22.2
N$20
  Top 0.152: R2.2 62.33,68.12 63.55,68.12 65.38,66.29 67.51,66.29 D1.1 67.67,66.29 67.67,69.49 67.31,69.85 67.31,69.88 68.26,70.83 68.26,71.86 J2.D+
N$21  (via drill 0.35)
  Top 0.152: v33.38,58.06 33.07,58.37 33.07,59.28 33.22,59.44 33.22,61.11 IC2.29 | v17.37,55.02 16.61,54.25 D5.C
  Bottom 0.152: v33.38,58.06 20.42,58.06 v17.37,55.02
N$22
  Top 0.152: D5.A 16.61,52.43 16.61,51.82 19.51,48.92 21.34,48.92 22.4,47.85 22.4,47.09 R10.1
N$23
  Top 0.152: D10.A 86.26,29.57 86.26,26.06 83.52,23.32 83.52,21.64 R29.1
N$24
  Top 0.152: S1.1 34.29,8.99 35.97,8.99 38.25,6.71 44.2,6.71 46.79,4.12 59.59,4.12 60.2,4.72 60.81,4.72 61.42,5.33 61.42,10.82 60.66,11.58 XB2.5
N$25
  Top 0.152: D13.A 85.04,12.34 83.67,12.34 82.14,13.87 R30.1
N$26
  Top 0.152: 89.31,62.18 97.69,62.18 CT1_VPOT.2 | 89.31,62.18 89,61.87 R12.2 89.31,62.18 | 89.31,62.18 89,62.48 89,63.25 R11.2 88.85,63.4 87.94,63.4 87.02,64.31 87.02,69.65 87.17,69.8 87.17,70.71 86.72,71.17 85.8,71.17 83.52,73.46 | U3.2 66.14,58.52 66.14,60.96 U3.3 | 83.52,73.46 83.82,73.76 CT1_BPOT.2 | 83.52,73.46 81.38,71.32 81.38,69.95 CT1_APOT.1
  Bottom 0.152: U3.3 72.39,60.96 CT1_APOT.1
N$27
  Top 0.152: D14.A 14.94,47.09 16.92,47.09 R32.1
N$36
  Top 0.152: R14.1 88.85,44.04 88.85,51.05 86.41,53.49 86.41,54.56 JK2_HDR.1 86.41,54.71 88.7,57 90.22,57 CT2_JACK.TIP
N$42
  Top 0.152: U4.2 76.2,48.31 77.42,49.53 CT2_APOT.1 81.38,49.53 83.82,51.97 CT2_BPOT.2
N$58
  Top 0.152: R11.1 88.85,65.08 88.85,71.32 86.41,73.76 86.41,74.83 JK1_HDR.1 88.7,77.27 90.22,77.27 CT1_JACK.TIP
N$59  (via drill 0.35)
  Top 0.152: v34.9,60.35 34.9,61.11 IC2.32 | v7.47,66.6 6.4,67.67 R23.1 6.25,67.82 5.49,67.82 4.42,68.89 4.42,69.95 5.94,71.48 6.25,71.48 R24.2
  Bottom 0.152: v34.9,60.35 33.68,60.35 30.48,63.55 20.12,63.55 17.07,66.6 v7.47,66.6
N$66
  Top 0.152: R17.1 87.63,33.07 87.02,33.68 | 87.02,33.68 86.41,34.29 JK3_HDR.1 87.02,33.68 | 87.02,33.68 87.17,33.68 90.22,36.73 CT3_JACK.TIP
N$67
  Top 0.152: 87.94,21.49 96.47,21.49 CT3_VPOT.2 | 87.94,21.49 87.63,21.18 R18.2 87.94,21.49 | R17.2 87.63,21.79 87.94,21.49
  Bottom 0.152: U5.3 74.98,31.7 83.36,31.7 93.42,21.64 96.47,21.64 CT3_VPOT.2
N$70
  Top 0.152: U5.2 76.2,30.48 CT3_APOT.1 82.45,32.92 82.45,35.51 CT3_BPOT.2
N$76
  Top 0.152: 89.76,15.24 89.76,13.11 CT4_JACK.TIP | 89.76,15.24 89.76,16.46 R20.1 89.76,15.24 | 89.76,15.24 JK4_HDR.1
N$77
  Top 0.152: R20.2 87.94,16.61 85.95,16.61 R21.2 85.8,16.46 85.8,15.54 84.89,14.63 83.67,14.63 82.91,15.39 82.91,15.7 82.75,15.85 79.4,15.85 76.2,12.65 CT4_VPOT.2 69.8,11.43 68.58,10.21 U6.3
P5-9V_VINB  (via drill 0.35)
  Top 0.152: v7.62,6.35 8.89,5.08 D11.+
  Bottom 0.152: v7.62,6.35 2.34,11.63 2.34,20.27 2.54,20.48 2.54,53.34 3.81,54.61 6.35,54.61 6.66,54.3 6.75,54.3 7.31,53.74 7.31,53.65 7.62,53.34 7.62,44.45 8.21,43.86
P5-9V_VINM
  Top 0.152: U$3.1 8.99,12.8 9.3,12.8 10.36,13.87 12.19,13.87 12.34,13.72 12.34,10.67 15.24,7.77 15.24,7.47 15.39,7.32 17.07,7.32 17.22,7.47 17.22,9.14 16,10.36 14.33,10.36 12.95,11.73 12.95,14.02 11.73,15.24 10.06,15.24 6.25,19.05 6.25,22.55 3.5,25.3 3.5,40.39 6.25,43.13 FRDM1.J9_16
P5V0_SDA_USB
  Top 0.152: L1.1 61.27,72.39 63.09,70.56 65.08,70.56 65.38,70.87 65.38,73.46 64.77,74.07 64.77,75.29 65.84,76.35 71.32,76.35 72.39,75.29 72.39,74.07 70.56,72.24 70.26,72.24 J2.VBUS
P5V_SDA
  Top 0.152: 36.73,64.31 41.91,64.31 49.99,72.39 L1.2 | 36.73,64.31 35.36,64.31 IC2.6 | 10.06,72.08 10.52,71.63 11.43,71.63 | 10.06,72.08 7.47,74.68 7.47,75.59 C5.1 | 7.32,69.34 8.23,68.43 8.23,66.45 3.2,61.42 3.2,25.15 5.94,22.4 5.94,18.9 9.91,14.94 11.58,14.94 12.65,13.87 12.65,11.58 15.85,8.38 16.15,8.38 D12.+ | 7.32,69.34 6.4,69.34 R23.2 7.32,69.34 | 7.32,69.34 10.06,72.08 | 36.73,64.31 36.73,75.74 34.29,78.18 19.96,78.18 13.41,71.63 11.43,71.63 | 11.43,71.63 R25.2
RST_TGTMCU  (via drill 0.35)
  Top 0.152: 32.31,76.2 31.24,76.2 30.48,75.44 R31.1 | 32.31,76.2 S2.1 | v29.41,57.45 29.41,62.18 30.48,63.25 30.63,63.25 IC2.21 | C2.1 42.52,49.53 43.13,48.92 U$6.10 | 32.31,76.2 32.31,77.72 32.16,77.88 23.77,77.88 17.83,71.93 17.83,65.53 18.44,64.92 v18.44,63.86
  Bottom 0.152: U$6.10 43.13,48.92 34.59,57.45 v29.41,57.45 26.36,54.41 17.07,54.41 16.76,54.71 16.76,55.32 18.44,57 v18.44,63.86
SDA_EXTAL
  Top 0.152: IC2.17 30.63,65.23 23.93,65.23 15.39,56.69 Y3.3
SDA_JTAG_TCLK  (via drill 0.35)
  Top 0.152: v33.38,66.6 33.38,65.84 IC2.12 | v29.87,68.43 23.62,68.43 22.86,69.19 U$2.4
  Bottom 0.152: v33.38,66.6 31.7,66.6 v29.87,68.43
SDA_JTAG_TDI
  Top 0.152: IC2.13 32.77,65.84 32.77,70.1 27.28,75.59 27.28,76.05 27.13,76.2 23.62,76.2 18.14,70.71 18.14,68.89 18.59,68.43 19.51,68.43 20.27,69.19 U$2.8
SDA_JTAG_TDO  (via drill 0.35)
  Top 0.152: v26.06,69.8 29.87,69.8 32.16,67.51 32.16,65.84 IC2.14
  Bottom 0.152: v26.06,69.8 24.69,68.43 22.4,68.43 21.64,69.19 U$2.6
SDA_JTAG_TMS
  Top 0.152: 25.45,69.19 24.23,69.19 U$2.2 | 25.45,69.19 30.02,69.19 31.7,67.51 31.7,65.84 IC2.15 | 25.45,69.19 25.45,75.29 R9.2
SDA_PTD6  (via drill 0.35)
  Top 0.152: v33.68,58.98 34.29,59.59 34.29,61.11 IC2.31 | v30.02,58.67 30.02,43.74 27.28,41 27.28,38.25 v31.39,34.14 | v32.31,33.22 35.05,33.22 36.73,31.55 U$1.35
  Bottom 0.152: v33.68,58.98 30.33,58.98 v30.02,58.67 | v32.31,33.22 v31.39,34.14
SDA_RST  (via drill 0.35)
  Top 0.152: R26.2 R25.1 11.43,73.15 v14.02,73.15 | v25.76,64.16 30.63,64.16 IC2.19
  Bottom 0.152: v25.76,64.16 24.08,64.16 19.05,69.19 U$2.10 19.05,69.34 17.83,69.34 v14.02,73.15
SDA_SPIO_SCK
  Top 0.152: IC2.26 31.85,61.11 31.85,57.76 34.14,54.2 47.7,54.2 48.16,55.93 48.16,58.83 45.11,61.87 45.11,62.48 U1.12
SDA_SPIO_SIN
  Top 0.152: IC2.28 32.77,61.11 32.77,57.76 33.07,57.45 36.88,57.45 43.74,64.31 46.63,64.31 47.55,63.4 47.55,62.64 U1.8
SDA_SWD_EN  (via drill 0.35)
  Top 0.152: U1.10 46.33,62.64 46.33,63.25 45.87,63.7 44.81,63.7 44.5,63.4 44.5,62.64 U1.13 44.5,62.48 44.5,59.89 45.57,58.83 v45.57,58.52 | 30.48,65.68 21.18,65.68 18.75,63.25 17.53,63.25 17.37,63.4 R6.1 | 30.48,65.68 31.24,65.68 IC2.16 | 30.48,65.68 v30.48,65.99
  Bottom 0.152: v45.57,58.52 37.95,58.52 v30.48,65.99
SDA_SWD_OE_B  (via drill 0.35)
  Top 0.152: v25.45,62.94 26.21,63.7 30.63,63.7 IC2.20 | v14.63,64.47 13.56,63.4 R5.1 | v36.73,56.84 43.74,56.84 U1.1
  Bottom 0.152: v14.63,64.47 18.75,64.47 20.27,62.94 v25.45,62.94 30.63,62.94 v36.73,56.84
SDA_USB_VOUT33
  Top 0.152: IC2.5 35.36,63.86 41.91,63.86 49.68,71.63 52.88,71.63 53.03,71.78 53.03,73 52.27,73.76 44.2,73.76 43.28,74.68 C14.2
SDA_XTAL
  Top 0.152: IC2.18 30.63,64.77 25.45,64.77 18.59,57.91 18.59,53.49 17.83,52.73 Y3.1
SLPB
  Top 0.152: U$1.46 38.86,37.03 44.81,42.98 48.77,42.98 51.05,40.69 51.97,40.69 FRDM1.J19_13
SLPM
  Bottom 0.152: XB2.13 38.56,17.83 38.56,18.44 49.53,29.41 49.53,30.94 50.6,32 52.58,32 53.49,32.92 53.49,39.47 54.56,40.54 FRDM1.J19_14
SPI0_SOUT
  Top 0.152: IC2.27 32.31,61.11 32.31,57.76 34.29,55.78 44.04,55.78 44.35,56.08 44.35,56.69 U1.2
SWD_CLK_TGTMCU
  Top 0.152: U1.11 45.72,61.72 49.07,58.37 49.07,48.46 48.62,48.01 47.85,48.01 47.09,48.77 U$6.4
SWD_DIO_TGTMCU  (via drill 0.35)
  Top 0.152: 44.96,57.91 44.96,58.98 43.13,60.81 43.13,63.25 43.89,64.01 46.33,64.01 46.94,63.4 46.94,62.64 U1.9 | 44.96,57.91 44.96,56.84 U1.3 | v32,32 U$1.25 | v32.92,36.12 33.22,36.12 40.84,43.74 v40.84,44.04 | 44.96,57.91 47.09,57.91 v47.55,58.37
  Bottom 0.152: v32,32 32.92,32.92 v32.92,36.12 | v40.84,44.04 43.43,44.04 48.16,48.77 U$6.2 48.31,48.92 49.07,49.68 49.07,56.39 47.55,57.91 v47.55,58.37
UART1_RXB
  Top 0.152: U$1.2 26.06,37.49 26.82,37.49 28.96,35.36 28.96,31.39 23.01,25.45 23.01,19.2 23.62,18.59 30.48,18.59 32.31,16.76 47.24,16.76 49.84,19.36 51.21,19.36 51.97,20.12 51.97,25.3 FRDM1.J19_1
UART1_RXM
  Top 0.152: FRDM1.J19_2 56.24,23.77 56.24,10.67 60.5,6.4 60.5,5.79 XB2.2
UART1_TXB  (via drill 0.35)
  Top 0.152: v30.18,32.92 30.18,34.75 26.98,37.95 26.06,37.95 U$1.1 | v48.92,30.63 51.51,28.04 51.97,28.04 FRDM1.J19_3
  Bottom 0.152: v30.18,32.92 32.46,30.63 v48.92,30.63
UART1_TXM
  Top 0.152: XB2.3 60.5,7.77 60.5,8.38 57.15,11.73 57.15,25.91 55.17,27.89 54.71,27.89 FRDM1.J19_4
UART1RX_TGTMCU
  Top 0.152: IC2.25 31.24,61.11 31.24,44.5 27.58,40.84 27.58,39.17 31.24,35.51 33.22,35.51 41.45,43.74 46.48,43.74 R7.2
UART1TX_TGTMCU  (via drill 0.35)
  Top 0.152: v30.63,56.84 30.63,61.72 IC2.24 | v42.22,45.26 51.51,45.26 53.49,43.28 53.49,35.51 52.43,34.44 50.14,34.44 47.85,36.73 47.85,38.1 R8.2
  Bottom 0.152: v42.22,45.26 v30.63,56.84
UARTRX
  Top 0.152: U$1.39 44.04,33.53 46.94,36.42 46.94,41.91 46.63,42.22 R7.1
UARTTX
  Top 0.152: U$1.40 37.49,34.14 42.06,34.14 46.02,38.1 R8.1
VCCB  (via drill 0.35)
  Top 0.152: 35.81,64.92 35.66,64.77 35.36,64.77 IC2.7 | 35.81,64.92 35.81,67.51 28.65,74.68 28.65,76.05 | 28.65,76.05 29.57,76.96 30.48,76.96 R31.2 | 28.65,76.05 27.74,76.96 25.45,76.96 R9.1 | v36.12,61.72 35.36,61.72 IC2.1 | v43.74,61.27 43.74,62.48 U1.14 | v46.94,76.2 46.94,77.57 C4.2 | v36.12,64.92 35.81,64.92 | 12.75,60.3 12.95,61.57 11.89,62.64 11.89,63.4 R5.2 | 12.75,60.3 15.54,63.09 15.54,63.4 R6.2 15.7,63.55 15.7,64.31 17.22,65.84 v17.22,70.87 | R32.2 18.75,47.09 20.73,47.09 R10.2 | R32.2 18.59,46.94 18.59,45.11 16.76,43.28 C3.1 16.76,43.13 22.86,37.03 U$1.3 26.82,37.03 28.35,35.51 v28.35,33.38 | 12.75,53.56 12.75,50.7 17.07,48.92 17.53,48.92 18.59,47.85 18.59,47.09 R32.2 | 12.75,53.56 12.75,60.3 | C10.1 54.71,8.69 54.71,5.33 C8.1 54.56,5.18 48.31,5.18 C9.1 48.31,5.33 48.31,8.69 C11.1 48.16,8.84 45.57,11.43 41.91,11.43 C12.1 41.91,11.58 38.71,14.78 34.75,14.78 34.29,15.24 | F1.2 11.43,12.65 11.43,8.99 12.8,7.62 C16.1 14.63,7.62 15.24,7.01 17.22,7.01 17.53,7.32 17.53,13.41 | 26.06,20.12 26.06,32 U$1.13 | U$1.30 34.44,28.5 34.44,19.2 v32.61,17.37 31.09,18.9 23.77,18.9 23.32,19.36 23.32,25.15 28.65,30.48 | 28.65,30.48 36.12,37.95 37.34,37.95 U$1.48 | v27.58,20.12 26.06,20.12 | 28.65,30.48 v28.8,30.33 | 26.06,20.12 U$1.14 | 34.29,15.24 32.16,15.24 30.48,13.56 IC7.1 30.48,13.41 20.42,13.41 D2.C 20.27,13.41 17.53,13.41 | 17.53,13.41 16.31,13.41 13.41,16.31 11.43,16.31 C13.1 | 34.29,15.24 C6.1 | 12.75,53.56 12.53,53.34 11.43,53.34
  Bottom 0.152: 34.29,63.09 26.98,70.41 24.23,70.41 U$2.1 24.08,70.56 23.32,71.32 17.68,71.32 v17.22,70.87 | 34.29,63.09 35.66,61.72 v36.12,61.72 36.58,61.27 v43.74,61.27 | v43.74,61.27 48.16,56.84 48.16,50.29 U$6.1 | v46.94,76.2 46.94,64.47 v43.74,61.27 | 34.29,63.09 v36.12,64.92 | v32.61,17.37 32.61,15.7 30.48,13.56 IC7.1 | v28.8,30.33 v27.58,20.12 28.35,32.31 v28.35,33.38
VCCM  (via drill 0.35)
  Top 0.152: U2.11 63.7,41.91 | 63.7,41.91 U2.4 59.44,41.91 v58.22,43.13 | 63.7,39.01 63.86,38.86 64.01,38.86 64.77,38.1 U2.8 | 63.7,41.91 63.7,39.01 | U2.1 58.98,45.72 v58.37,45.11 | 63.7,39.01 56.69,32 54.71,32 53.49,30.79 53.49,30.18 54.25,29.41 56.08,29.41 61.72,23.77 61.72,5.18 60.66,4.12 60.66,3.81 XB2.1
  Bottom 0.152: v58.37,45.11 58.37,43.28 v58.22,43.13 | FRDM1.J9_8 5.94,53.34 3.81,51.21 3.81,27.43 4.72,26.52 6.71,26.52 7.77,25.45 7.77,24.99 28.04,4.72 59.59,4.72 60.5,3.81 XB2.1
XTAL32
  Top 0.152: U$1.19 28.96,28.5 28.96,26.82 24.23,22.1 24.23,20.42 Y1.2

## Text on the board
tNames: Mick & Clinton | MUCKLES V30 | ENERGY SAVER